# EAGLE board motor (EAGLE 5.07)
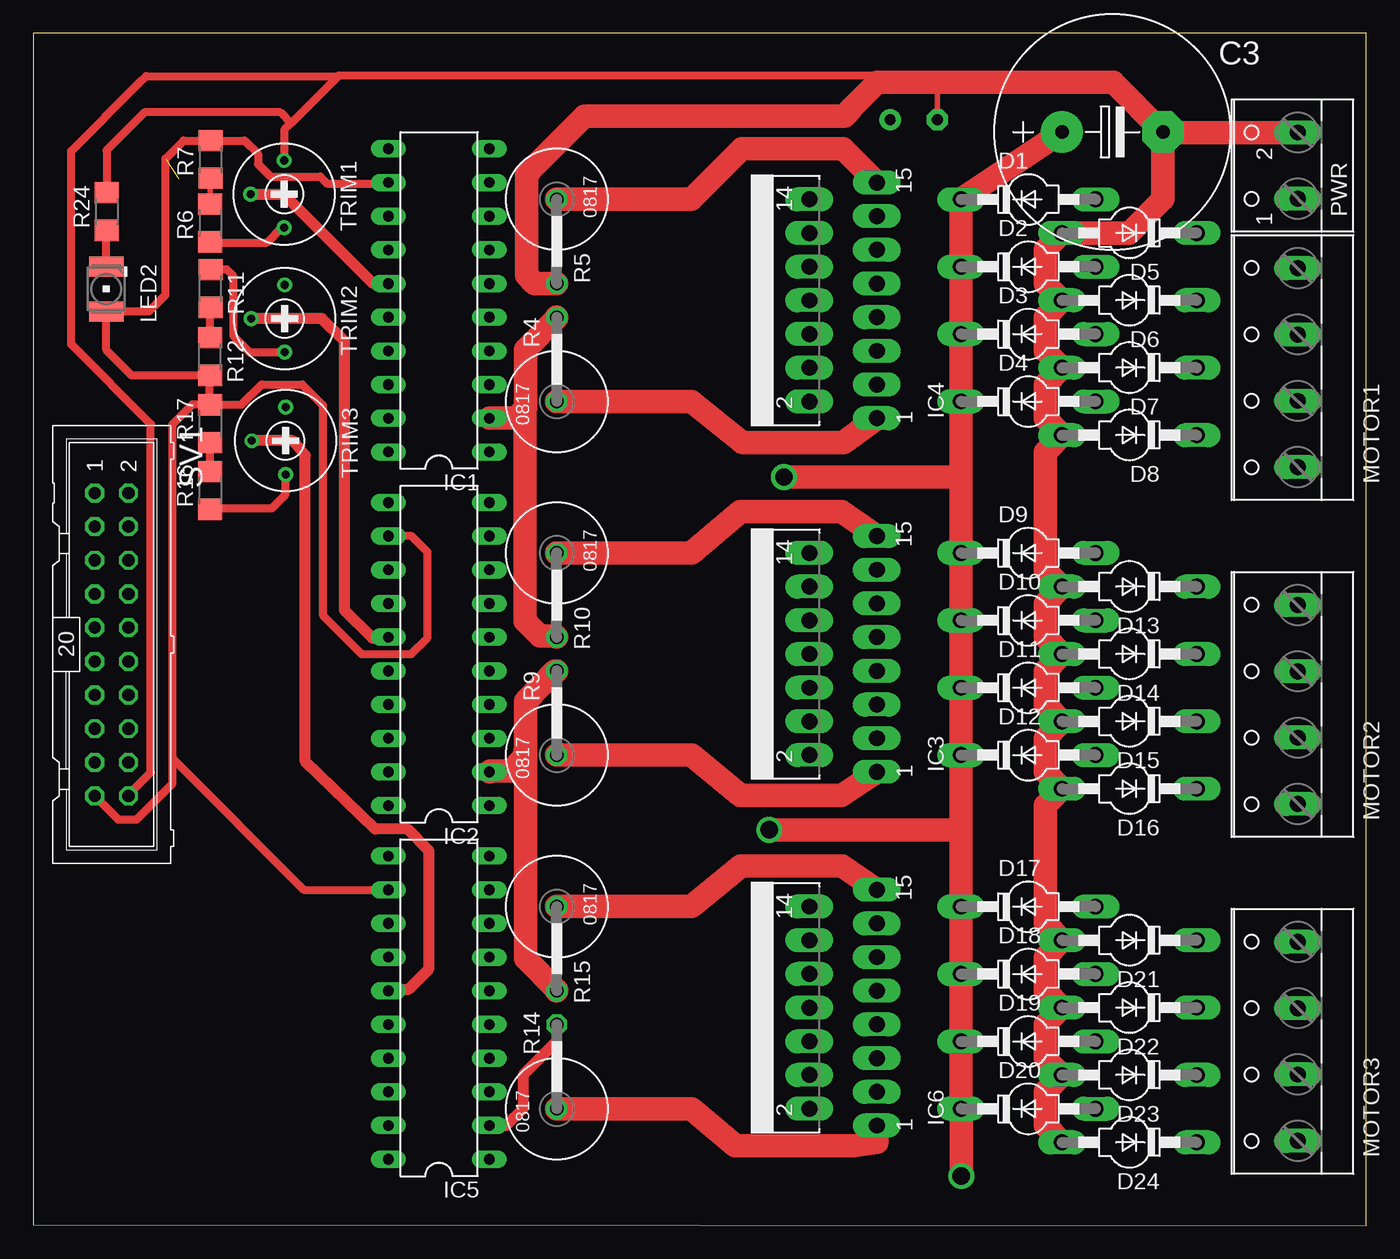
[diagram p0: board, top side]
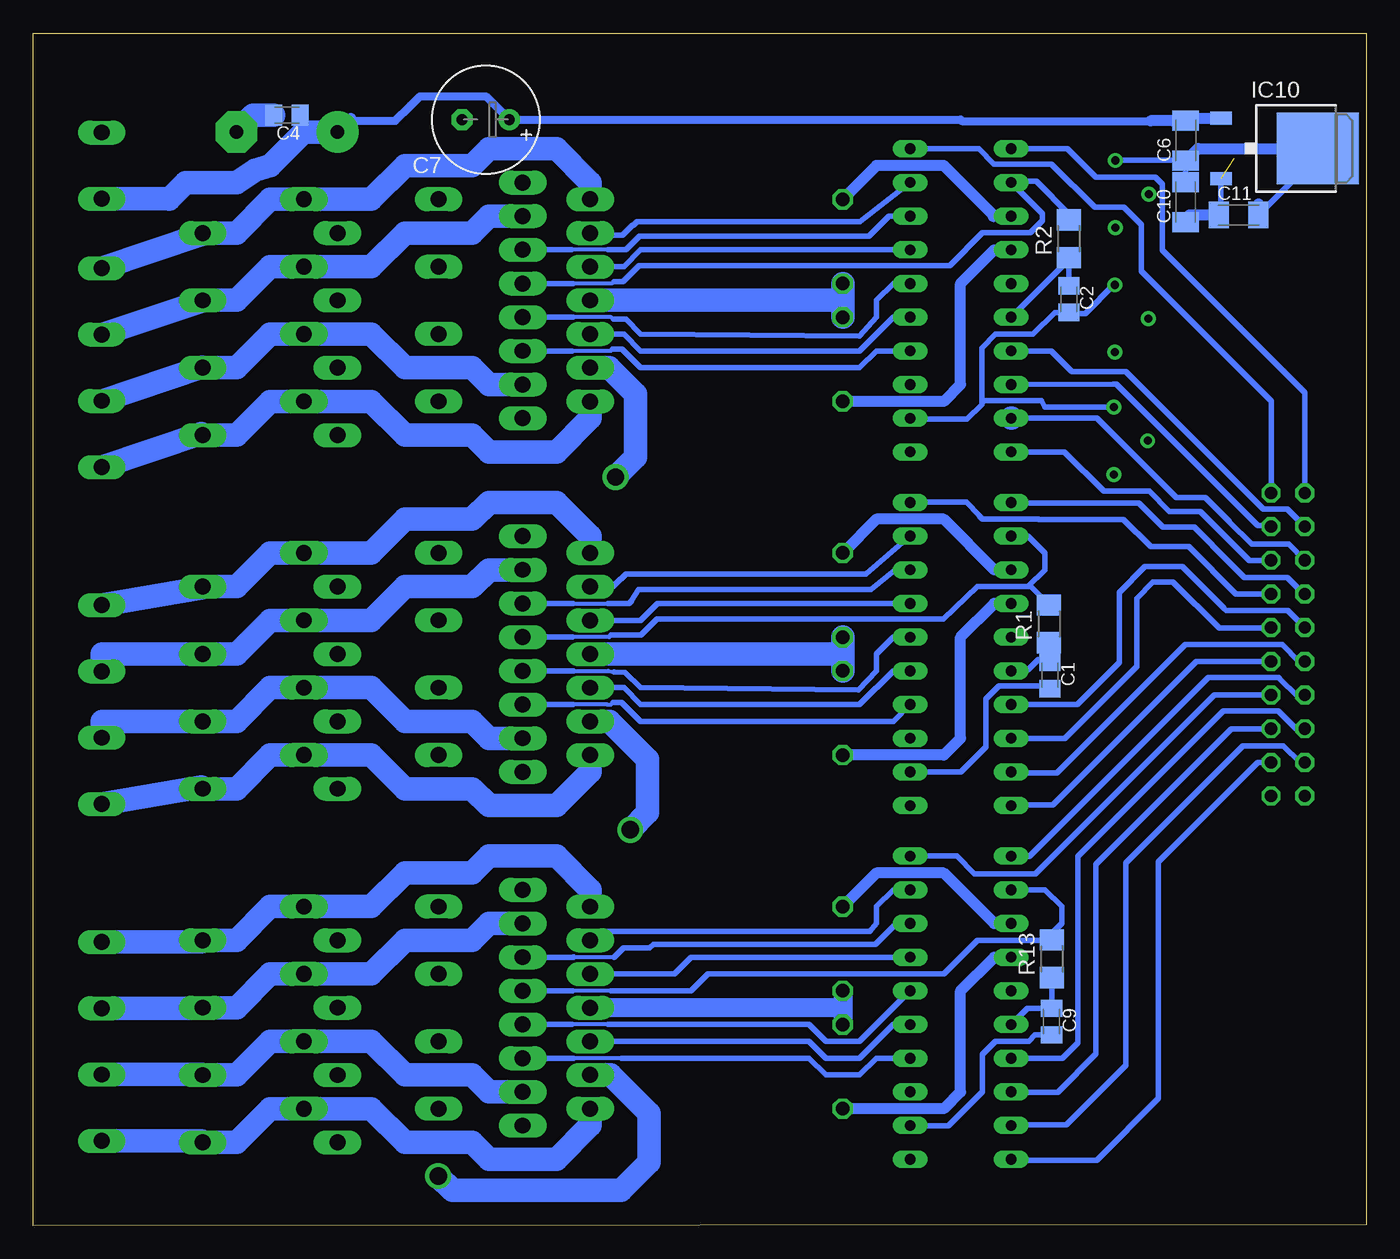
[diagram p1: board, bottom side, seen from below]

Size 100.54 x 89.94 mm. Coordinates in mm from the lower left corner, seen from the top.
Outline: 0.01,0.08 100.54,0 100.53,89.93 0,89.94 0.01,0.08
Copper layers (1*16): Top 0.035mm / dielectric 1.5mm / Bottom 0.035mm
Design rules "default": minimum track width 10mil, minimum drill 24mil, track to track 8mil, track to pad 8mil, pad to pad 8mil, via to via 8mil, smd to smd 8mil, copper to edge 40mil, drill to drill 8mil, minimum pad ring 10mil, minimum via ring 8mil, stop-mask expansion 4mil, vias tented up to drill 0mil, thermal gap 10mil

## Footprints (pad centres in the part's own frame; a part is rotated, then mirrored left to right if it is on the bottom)
C0805K = smd 1.3 x 1.6: 1 -1,0; 2 1,0
E7,5-18 = drill 1.016 pad 3.15 round: + -3.81,0 | drill 1.016 pad 3.15 octagon: - 3.81,0
C1206K = smd 1.5 x 2: 1 -1.5,0; 2 1.5,0
E3,5-8 = drill 0.813 pad 1.6 round: + -1.778,0 | drill 0.813 pad 1.6 octagon: - 1.778,0
SOD57-10 = drill 1.194 long: A 5.08,0; C -5.08,0
DIL20 = drill 0.813 long: 1 -11.43,-3.81; 2 -8.89,-3.81; 3 -6.35,-3.81; 4 -3.81,-3.81; 5 -1.27,-3.81; 6 1.27,-3.81; 7 3.81,-3.81; 8 6.35,-3.81; 9 8.89,-3.81; 10 11.43,-3.81; 11 11.43,3.81; 12 8.89,3.81; 13 6.35,3.81; 14 3.81,3.81; 15 1.27,3.81; 16 -1.27,3.81; 17 -3.81,3.81; 18 -6.35,3.81; 19 -8.89,3.81; 20 -11.43,3.81
MULTIWATT-15 = drill 1.2 long: 1 -8.89,-7.62; 2 -7.62,-2.54; 3 -6.35,-7.62; 4 -5.08,-2.54; 5 -3.81,-7.62; 6 -2.54,-2.54; 7 -1.27,-7.62; 8 0,-2.54; 9 1.27,-7.62; 10 2.54,-2.54; 11 3.81,-7.62; 12 5.08,-2.54; 13 6.35,-7.62; 14 7.62,-2.54; 15 8.89,-7.62
TO252 = smd 1 x 1.6: 1 -2.28,-4.8; 2 2.28,-4.8 | smd 5.4 x 6.2: 3 0,2.5
PLCC2 = smd 2.6 x 1.5: A 0,1.7; C 0,-1.7
W237-4 = drill 1.194 long: 1 -7.5,-1.27; 2 -2.5,-1.27; 3 2.5,-1.27; 4 7.5,-1.27
W237-102 = drill 1.194 long: 1 -2.5,-1.27; 2 2.5,-1.27
R1206 = smd 1.6 x 1.803: 1 -1.422,0; 2 1.422,0
P0817V = drill 1.016 octagon: 1 -5.08,0; 2 1.27,0
ML20 = drill 0.914 octagon: 1 -11.43,-1.27; 2 -11.43,1.27; 3 -8.89,-1.27; 4 -8.89,1.27; 5 -6.35,-1.27; 6 -6.35,1.27; 7 -3.81,-1.27; 8 -3.81,1.27; 9 -1.27,-1.27; 10 -1.27,1.27; 11 1.27,-1.27; 12 1.27,1.27; 13 3.81,-1.27; 14 3.81,1.27; 15 6.35,-1.27; 16 6.35,1.27; 17 8.89,-1.27; 18 8.89,1.27; 19 11.43,-1.27; 20 11.43,1.27
RTRIM3339P = drill 0.61 round: 1 -2.54,0; 2 0,-2.54; 3 2.54,0

## Placement (x,y rotation side)
C1  3,3n  [C0805K]  23.86,41.51 270 bottom
C2  3,3n  [C0805K]  22.44,69.88 270 bottom
C3  2,2m  [E7,5-18]  81.4,82.49 0 top
C4  100n  [C0805K]  81.4,83.76 180 bottom
C6  470u  [C1206K]  13.62,81.83 90 bottom
C7  100n  [E3,5-8]  66.4,83.42 180 bottom
C9  3,3n  [C0805K]  23.74,15.4 270 bottom
C10  10u  [C1206K]  13.64,77.2 90 bottom
C11  100n  [C1206K]  9.64,76.23 0 bottom
D1  BYV27  [SOD57-10]  75.05,77.41 0 top
D2  BYV27  [SOD57-10]  75.05,72.33 0 top
D3  BYV27  [SOD57-10]  75.05,67.25 0 top
D4  BYV27  [SOD57-10]  75.05,62.17 0 top
D5  BYV27  [SOD57-10]  82.67,74.87 180 top
D6  BYV27  [SOD57-10]  82.67,69.79 180 top
D7  BYV27  [SOD57-10]  82.67,64.71 180 top
D8  BYV27  [SOD57-10]  82.67,59.63 180 top
D9  BYV27  [SOD57-10]  75.05,50.74 0 top
D10  BYV27  [SOD57-10]  75.05,45.66 0 top
D11  BYV27  [SOD57-10]  75.05,40.58 0 top
D12  BYV27  [SOD57-10]  75.05,35.5 0 top
D13  BYV27  [SOD57-10]  82.67,48.2 180 top
D14  BYV27  [SOD57-10]  82.67,43.12 180 top
D15  BYV27  [SOD57-10]  82.67,38.04 180 top
D16  BYV27  [SOD57-10]  82.67,32.96 180 top
D17  BYV27  [SOD57-10]  75.05,24.07 0 top
D18  BYV27  [SOD57-10]  75.05,18.99 0 top
D19  BYV27  [SOD57-10]  75.05,13.91 0 top
D20  BYV27  [SOD57-10]  75.05,8.83 0 top
D21  BYV27  [SOD57-10]  82.67,21.53 180 top
D22  BYV27  [SOD57-10]  82.67,16.45 180 top
D23  BYV27  [SOD57-10]  82.67,11.37 180 top
D24  BYV27  [SOD57-10]  82.67,6.29 180 top
IC1  L297  [DIL20]  30.6,69.79 90 top
IC2  L297  [DIL20]  30.6,43.12 90 top
IC3  L298  [MULTIWATT-15]  56,43.12 90 top
IC4  L298  [MULTIWATT-15]  56,69.79 90 top
IC5  L297  [DIL20]  30.6,16.45 90 top
IC6  L298  [MULTIWATT-15]  56,16.45 90 top
IC10  7805DT  [TO252]  6.16,81.24 270 bottom
LED2  LG_T679-E1F1-1  [PLCC2]  5.51,70.64 180 top
MOTOR1  [W237-4]  94.1,64.71 90 top
MOTOR2  [W237-4]  94.1,39.31 90 top
MOTOR3  [W237-4]  94.1,13.91 90 top
PWR  [W237-102]  94.1,79.95 90 top
R1  22k  [R1206]  23.94,45.4 90 bottom
R2  22k  [R1206]  22.44,74.44 90 bottom
R4  0,5  [P0817V]  39.49,67.25 90 top
R5  0,5  [P0817V]  39.49,72.33 270 top
R6  5,6k  [R1206]  13.36,75.61 90 top
R7  560  [R1206]  13.38,80.42 90 top
R9  0,5  [P0817V]  39.49,40.58 90 top
R10  0,5  [P0817V]  39.49,45.66 270 top
R11  5,6k  [R1206]  13.38,70.69 270 top
R12  560  [R1206]  13.34,65.55 270 top
R13  22k  [R1206]  23.72,20.13 90 bottom
R14  0,5  [P0817V]  39.49,13.91 90 top
R15  0,5  [P0817V]  39.49,18.99 270 top
R16  5,6k  [R1206]  13.35,55.45 90 top
R17  560  [R1206]  13.35,60.49 90 top
R24  1k  [R1206]  5.54,76.49 90 top
SV1  [ML20]  5.91,43.83 270 top
TRIM1  10k  [RTRIM3339P]  18.94,77.8 270 top
TRIM2  10k  [RTRIM3339P]  18.97,68.42 270 top
TRIM3  10k  [RTRIM3339P]  19.03,59.2 270 top

## Library data of the parts
C1-C4 C6 C7 C9-C11 R1 R2 R4-R7 R9-R17 R24 TRIM1-TRIM3 = rcl
D1-D24 = diode
IC1-IC6 = st-microelectronics
IC10 = linear
LED2 = led; COLOR: green
MOTOR1-MOTOR3 PWR = con-wago-500
SV1 = con-ml

## Nets
+5V: C10.1 C11.1 IC1.12 IC2.12 IC3.9 IC4.9 IC5.12 IC6.9 IC10.2 LED2.A R1.2 R2.2 R7.2 R12.2 R13.2 R17.2 SV1.19
+24V: C3.+ C4.1 C6.2 C7.+ D1.C D2.C D3.C D4.C D9.C D10.C D11.C D12.C D17.C D18.C D19.C D20.C IC3.4 IC4.4 IC6.4 IC10.1 PWR.1
CLK1: IC1.18 SV1.4
CLK2: IC2.18 SV1.10
CLK3: IC5.18 SV1.16
CTL1: IC1.11 SV1.1
CTL2: IC2.11 SV1.7
CTL3: IC5.11 SV1.13
CW1: IC1.17 SV1.3
CW2: IC2.17 SV1.9
CW3: IC5.17 SV1.15
EN1: IC1.10 SV1.2
EN2: IC2.10 SV1.8
EN3: IC5.10 SV1.14
GND: C1.2 C2.2 C3.- C4.2 C6.1 C7.- C9.2 C10.2 C11.2 D5.A D6.A D7.A D8.A D13.A D14.A D15.A D16.A D21.A D22.A D23.A D24.A IC1.2 IC2.2 IC3.8 IC4.8 IC5.2 IC6.8 IC10.3 PWR.2 R4.2 R5.2 R9.2 R10.2 R14.2 R15.2 R24.2 SV1.20 TRIM1.1 TRIM2.1 TRIM3.1
HF1: IC1.19 SV1.5
HF2: IC2.19 SV1.11
HF3: IC5.19 SV1.17
N$1: IC1.9 IC4.12
N$2: IC1.7 IC4.10
N$3: IC1.6 IC4.7
N$4: IC1.4 IC4.5
N$6: C2.1 IC1.16 R2.1
N$7: IC1.5 IC4.6
N$8: IC1.8 IC4.11
N$9: IC2.9 IC3.12
N$10: IC2.7 IC3.10
N$11: IC2.6 IC3.7
N$12: IC1.14 IC4.1 R4.1
N$13: IC1.15 TRIM1.2
N$14: D4.A D8.C IC4.2 MOTOR1.1
N$15: D1.A D5.C IC4.14 MOTOR1.4
N$16: D2.A D6.C IC4.13 MOTOR1.3
N$17: D3.A D7.C IC4.3 MOTOR1.2
N$19: IC1.13 IC4.15 R5.1
N$20: IC2.4 IC3.5
N$21: C1.1 IC2.16 R1.1
N$22: IC2.5 IC3.6
N$23: R6.1 TRIM1.3
N$24: R6.2 R7.1
N$26: IC2.8 IC3.11
N$30: IC2.14 IC3.1 R9.1
N$31: D12.A D16.C IC3.2 MOTOR2.1
N$32: D9.A D13.C IC3.14 MOTOR2.4
N$33: D10.A D14.C IC3.13 MOTOR2.3
N$34: D11.A D15.C IC3.3 MOTOR2.2
N$35: IC2.13 IC3.15 R10.1
N$36: IC2.15 TRIM2.2
N$37: R11.1 TRIM2.3
N$38: R11.2 R12.1
N$39: IC5.9 IC6.12
N$40: IC5.7 IC6.10
N$41: IC5.6 IC6.7
N$42: IC5.4 IC6.5
N$43: C9.1 IC5.16 R13.1
N$44: IC5.5 IC6.6
N$45: IC5.8 IC6.11
N$46: IC5.14 IC6.1 R14.1
N$47: D20.A D24.C IC6.2 MOTOR3.1
N$48: D17.A D21.C IC6.14 MOTOR3.4
N$49: D18.A D22.C IC6.13 MOTOR3.3
N$50: D19.A D23.C IC6.3 MOTOR3.2
N$51: IC5.13 IC6.15 R15.1
N$52: IC5.15 TRIM3.2
N$53: R16.1 TRIM3.3
N$54: R16.2 R17.1
N$64: LED2.C R24.1
RS1: IC1.20 SV1.6
RS2: IC2.20 SV1.12
RS3: IC5.20 SV1.18

## Tracks (layer width: path | path; a pad name or v marks a point on that pad's centre or on a via)
+5V  (1 unrouted)
  Top 0.61: IC5.12 20.4,25.34 10.51,35.23 | 10.51,35.23 10.51,60.44 12.02,61.96 13.3,61.96 | 13.3,61.96 R17.2 15.7,61.91 17.23,63.44 20.3,63.44 21.84,61.9 21.84,46.07 24.79,43.12 28.51,43.12 29.74,44.34 29.74,50.82 28.55,52 IC2.12 | 10.51,35.23 10.51,33.34 7.8,30.64 6.41,30.64 SV1.19 | IC1.12 26.7,78.6 22.16,78.6 21.64,79.12 17.9,79.12 16.95,80.07 16.95,80.83 15.94,81.84 R7.2 11.35,81.84 9.98,80.48 9.98,70.21 8.75,68.97 5.54,68.97 LED2.A 5.51,66.04 7.42,64.13 R12.2 13.3,64.09 13.3,61.96
  Bottom 0.305: 59.83,71.06 56.89,71.06 56.73,71.21 | 59.85,17.72 57.36,17.72 56.97,17.72 | 59.86,44.39 57.1,44.39 56.95,44.54
  Bottom 0.406: 23.91,21.87 22.98,22.8 22.98,24.07 24.25,25.34 IC5.12 | 23.91,21.87 24.25,21.53 29.33,21.53 31.87,18.99 49.65,18.99 50.92,17.72 56.97,17.72 | 25.52,48.2 29.33,48.2 31.88,45.77 53.47,45.77 54.7,44.54 56.95,44.54 | 25.52,48.2 24.25,49.47 24.25,50.74 25.52,52.01 IC2.12 | 25.52,48.2 25.31,48.2 R1.2 | R13.2 23.72,21.68 23.91,21.87 | R2.2 22.44,76.31 24.9,78.76 26.7,78.76 IC1.12 24.42,76.32 24.42,75.8 25.35,74.88 28.95,74.88 31.42,72.41 54.85,72.41 56.05,71.21 56.73,71.21 | 59.83,71.06 IC4.9 | 59.83,71.06 | IC6.9 59.86,17.72 59.85,17.72 | IC3.9 59.86,44.39 | 10.96,76.41 IC10.2
  Bottom 0.813: 10.96,76.41 C11.1 13.34,76.23 C10.1
+24V  (via drill 1.3 pad 1.78)
  Top 1.778: C3.+ D1.C D2.C D3.C D4.C 69.97,56.63 | 69.97,29.36 69.97,24.7 69.9,24.64 69.9,24.13 D17.C D18.C D19.C D20.C 69.99,8.81 v69.99,3.75 | 69.97,29.36 D12.C D11.C D10.C D9.C 69.97,56.63 | v56.62,56.46 69.79,56.46 69.97,56.63 | v55.51,29.87 69.46,29.87 69.97,29.36
  Bottom 0.61: 76.75,83.33 73.22,83.33 72.08,84.47 | 72.08,84.47 | 72.08,84.47 71.37,85.18 66.39,85.18 C7.+ 30.6,83.42 30.5,83.32 14.63,83.32 14.61,83.33
  Bottom 0.813: C4.1 80.4,82.76 80.13,82.49 | IC10.1 13.43,83.52 C6.2 14.61,83.33 16.29,83.33 | C3.+ 76.75,83.33 76.58,83.5
  Bottom 1.778: PWR.1 90.33,77.45 90.29,77.41 89.02,78.68 85.21,78.68 83.79,79.62 82.67,79.95 80.13,82.49 C3.+ | IC4.4 57.09,64.71 55.11,62.73 55.11,57.96 v56.62,56.46 | IC3.4 57.08,38.04 54.2,35.16 54.2,31.17 v55.51,29.87 | IC6.4 57.01,11.37 54.11,8.47 54.11,4.79 56.21,2.69 68.92,2.69 v69.99,3.75
CLK1
  Bottom 0.406: IC1.18 26.77,63.43 19.07,63.49 18.87,63.49 8.18,52.8 7.26,52.8 SV1.4
CLK2
  Bottom 0.406: IC2.18 22.73,36.77 17.32,42.17 17.32,47.31 16.08,48.55 14.58,48.55 11.1,45.07 7.22,45.07 SV1.10
CLK3
  Bottom 0.406: SV1.16 10.17,37.49 20.39,27.26 20.39,12.95 23.26,10.08 26.77,10.08 IC5.18
CTL1
  Bottom 0.406: IC1.11 22.55,81.22 20.4,79.07 15.9,79.07 15.38,78.55 15.38,73.59 4.63,62.84 4.63,55.28 SV1.1
CTL2
  Bottom 0.406: 23.24,54.52 22.14,54.52 | 23.24,54.52 26.76,54.52 IC2.11 | SV1.7 4.72,47.65 5.77,48.7 | 5.77,48.7 | 5.77,48.7 5.96,48.88 9.19,48.88 11.61,51.31 11.61,51.33 12.96,52.68 15.33,52.68 17.16,54.5 23.22,54.5 23.24,54.52
CTL3
  Bottom 0.406: SV1.13 5.29,40.03 6.44,41.17 | 6.44,41.17 | 6.44,41.17 6.62,41.35 11.92,41.35 25.41,27.85 26.75,27.85 IC5.11
CW1
  Bottom 0.406: IC1.17 23.75,65.98 22.2,64.43 18.14,64.43 7.75,54.04 5.96,54.04 SV1.3
CW2
  Bottom 0.406: IC2.17 21.79,39.31 18.64,42.46 18.64,47.76 16.69,49.71 13.87,49.71 12.16,48 12.15,48 10.74,46.58 10.74,46.57 10.57,46.4 5.94,46.4 SV1.9
CW3
  Bottom 0.406: SV1.15 5.28,37.49 6.48,38.69 6.51,38.69 6.64,38.82 10.79,38.82 21.75,27.86 21.75,13.81 22.93,12.63 IC5.17
EN1
  Bottom 0.406: IC1.10 29.22,81.22 28.07,80.07 23.75,80.07 20.49,76.81 18.27,76.81 16.96,75.51 16.96,71.98 7.16,62.18 7.16,55.29 SV1.2
EN2
  Bottom 0.406: IC2.10 34.39,54.56 30.17,54.56 29.19,53.57 29.19,53.53 28.95,53.3 24.72,53.3 24.69,53.27 18.32,53.27 16.27,51.21 13.4,51.21 9.83,47.65 SV1.8
EN3
  Bottom 0.406: SV1.14 11.47,40.03 24.94,26.55 29.56,26.55 30.89,27.88 IC5.10
GND
  Top 0.406: C7.- 68.18,85.96 67.91,86.23
  Top 0.61: TRIM1.1 18.94,82.65 19.45,83.16 | 22.99,86.7 19.45,83.16 | 65.07,86.23 64.55,86.75 23.04,86.75 22.99,86.7 | R24.2 5.55,81.11 8.4,83.97 18.65,83.97 19.45,83.16 | SV1.20 7.18,32.48 8.88,34.18 8.88,60.46 2.86,66.49 2.86,81.04 7.94,86.12 7.94,86.13 8.24,86.42 8.52,86.7 22.99,86.7
  Top 0.813: IC5.2 35.68,7.56 36.95,8.83 36.95,11.37 39.49,13.91 R14.2
  Top 1.778: D24.A 76.32,7.56 76.32,10.1 D23.A 76.32,12.64 76.32,15.18 D22.A 76.32,17.72 76.32,20.26 D21.A 76.32,22.8 76.32,31.69 D16.A 76.32,34.23 76.32,36.77 D15.A 76.32,39.31 76.32,41.85 D14.A 76.32,44.39 76.32,46.93 D13.A 76.32,49.47 76.32,58.36 D8.A 76.32,60.9 76.32,63.44 D7.A 76.32,65.98 76.32,68.52 D6.A 76.32,71.06 76.32,73.6 D5.A 82.67,74.87 85.21,77.41 C3.- | PWR.2 85.25,82.45 C3.- | C3.- 81.46,86.23 67.91,86.23 65.07,86.23 63.68,86.23 61.72,84.27 61.72,84.24 61.18,83.69 41.58,83.69 37.34,79.45 37.34,79.39 37.19,79.24 37.19,71.69 37.83,71.06 R5.2 | R4.2 39.49,68.44 37.13,66.08 37.13,61.67 37.01,61.55 | IC1.2 34.44,60.93 36.39,60.93 37.01,61.55 | R9.2 39.35,41.85 37.15,39.53 37.15,35.98 | 37.15,35.98 37.04,35.31 36.03,34.3 34.48,34.3 IC2.2 | R15.2 39.49,17.81 37.12,20.18 37.12,35.89 37.15,35.98 | 37.01,61.55 37.08,61.55 37.08,45.61 38.22,44.47 39.41,44.47 R10.2
  Bottom 0.406: TRIM2.1 19.02,70.96 21.18,68.8 22.37,68.8 C2.2 23.49,68.88 25.14,67.23 27.99,67.23 29.01,66.2 29.01,61.95 | C1.2 23.92,40.69 27.73,40.69 28.68,39.74 28.68,36.12 30.58,34.23 IC2.2 | C10.2 13.6,80.31 C6.1 13.63,80.34 TRIM1.1 | TRIM3.1 24.23,61.74 24.52,62.21 28.9,62.21 29.01,61.95 | IC1.2 34.32,60.82 30.14,60.82 29.01,61.95 | C9.2 24.99,14.4 25.47,13.92 27.97,13.92 28.94,12.95 28.94,10.12 31.52,7.54 34.39,7.54 IC5.2 | IC4.8 39.5,69.79 39.5,71.08 | IC3.8 39.61,43.12 39.55,43.18 39.55,44.36 39.49,44.41 | 4.91,80.28 4.91,79.46 C11.2
  Bottom 0.813: C6.1 12.71,81.24 IC10.3 4.2,80.71 4.33,80.71 4.75,80.28 4.91,80.28 | C11.2 8.14,77.05
  Bottom 1.422: 39.49,16.45 IC6.8 | R15.2 39.49,16.45 | 39.49,16.45 R14.2
  Bottom 1.778: 39.49,43.12 IC3.8 | 39.49,43.12 R9.2 | R10.2 39.49,43.12 | IC4.8 39.49,69.79 R5.2 R4.2 | C4.2 83.94,83.76 C3.-
HF1
  Bottom 0.406: IC1.19 20.34,60.89 14.35,54.9 12.13,54.9 10.34,53.11 10.34,53.08 8.65,51.4 5.86,51.4 SV1.5
  Bottom 1.778: IC1.19
HF2
  Bottom 0.406: IC2.19 26.7,34.14 23.33,34.14 13.64,43.84 6.35,43.84 5.08,42.57 SV1.11
HF3
  Bottom 0.406: SV1.17 5,34.95 6.25,36.19 9.32,36.19 18.15,27.36 18.15,12.09 22.62,7.62 26.72,7.62 IC5.19
N$1
  Bottom 0.406: IC1.9 38.18,75.71 54.99,75.71 55.25,75.46 55.32,75.46 56.09,74.69 58.36,74.69 IC4.12
N$2
  Bottom 0.406: IC4.10 56,72.33 54.73,73.6 IC1.7
N$3
  Bottom 0.305: 59.8,68.52 56.95,68.52 56.79,68.36
  Bottom 0.406: IC1.6 35.68,71.06 36.95,69.79 36.95,68.52 38.23,67.09 54.73,67.25 55.83,68.36 56.79,68.36 | 59.8,68.52 IC4.7 | 59.8,68.52
N$4
  Bottom 0.305: 59.88,65.98 56.99,65.98 56.85,66.11
  Bottom 0.406: IC1.4 36.95,65.98 38.22,64.71 54.73,64.71 56.13,66.11 56.85,66.11 | IC4.5 59.89,65.98 59.88,65.98
N$6
  Bottom 0.406: C2.1 R2.1 22.44,72.86 IC1.16
N$7
  Bottom 0.406: IC4.6 56,67.25 54.73,65.98 38.22,65.98 35.68,68.52 IC1.5
N$8
  Bottom 0.305: 59.95,73.6 57.2,73.6
  Bottom 0.406: 37.1,75.04 37.52,74.62 54.82,74.62 55.84,73.6 55.85,73.6 57.2,73.6 | 37.1,75.04 | 37.1,75.04 35.99,76.15 IC1.8 | IC4.11 59.96,73.6 59.95,73.6
N$9
  Bottom 0.406: IC2.9 37.75,49.14 55.84,49.14 56.21,48.77 56.25,48.77 56.84,48.18 58.51,48.18 IC3.12
N$10
  Bottom 0.406: IC3.10 54.73,45.66 53.46,46.93 IC2.7
N$11
  Bottom 0.305: 59.78,41.85 57.17,41.85 56.75,41.75
  Bottom 0.406: IC2.6 35.68,44.39 36.95,43.12 36.95,41.85 38.29,40.42 54.73,40.58 55.89,41.74 56.75,41.75 | IC3.7 59.78,41.85
N$12
  Top 1.778: IC4.1 61.11,59.06 53.49,59.06 49.65,62.17 R4.1
  Bottom 0.813: R4.1 31.87,62.17 30.6,63.44 30.6,71.06 28.06,73.6 IC1.14
N$13
  Top 0.813: TRIM1.2 18.9,77.8 25.64,71.06 IC1.15
N$14
  Bottom 1.778: MOTOR1.1 87.87,59.75 D8.C 85.21,59.63 82.67,62.17 D4.A 75.05,62.17 72.51,59.63 67.43,59.63 66.16,58.36 61.08,58.36 58.54,60.9 IC4.2
N$15
  Bottom 1.778: MOTOR1.4 87.87,74.75 D5.C 85.21,74.87 82.67,77.41 D1.A 75.05,77.41 72.51,79.95 67.43,79.95 66.16,81.22 61.08,81.22 58.54,78.68 IC4.14
N$16
  Bottom 1.778: MOTOR1.3 87.79,69.75 D6.C 85.21,69.79 82.67,72.33 D2.A 75.05,72.33 72.51,74.87 67.43,74.87 66.16,76.14 IC4.13
N$17
  Bottom 1.778: MOTOR1.2 87.79,64.75 D7.C 85.21,64.71 82.67,67.25 D3.A 75.05,67.25 72.51,64.71 67.43,64.71 66.16,63.44 IC4.3
N$19
  Top 1.778: IC4.15 61.08,81.22 53.46,81.22 49.65,77.41 R5.1
  Bottom 0.813: R5.1 36.95,79.95 31.87,79.95 28.06,76.14 28.09,76.1 28.12,76.1 28.09,76.14 IC1.13
N$20
  Bottom 0.305: 59.81,39.31 57.23,39.31 56.97,39.31 56.81,39.47
  Bottom 0.406: IC2.4 35.68,38.04 54.73,38.04 56.15,39.47 56.81,39.47 | IC3.5 59.81,39.31
N$21
  Bottom 0.406: R1.1 23.94,42.75 C1.1 24.74,42.72 25.49,41.96 26.67,41.96 IC2.16
N$22
  Bottom 0.406: IC3.6 56,40.58 54.73,39.31 38.22,39.31 35.68,41.85 IC2.5
N$23
  Top 0.61: TRIM1.3 18.76,75.26 17.64,74.15 13.4,74.15 R6.1
N$24
  Top 0.406: R6.2 13.36,78.98 R7.1
N$26
  Bottom 0.305: 59.82,46.93 57.2,46.93 57.19,46.94
  Bottom 0.406: IC2.8 35.56,49.47 37.35,48 54.88,48 55.4,47.15 55.4,47.13 55.59,46.94 57.19,46.94 | 63.6,46.94 IC3.11 59.82,46.93
N$30
  Top 1.778: IC3.1 60.96,32.45 53.34,32.45 49.65,35.5 R9.1
  Bottom 0.813: R9.1 31.87,35.5 30.6,36.77 30.6,44.39 28.06,46.93 IC2.14
N$31
  Bottom 1.778: MOTOR2.1 87.87,33.08 D16.C 85.21,32.96 82.67,35.5 D12.A 75.05,35.5 72.51,32.96 67.43,32.96 66.16,31.69 61.08,31.69 58.54,34.23 IC3.2
N$32
  Bottom 1.778: MOTOR2.4 87.87,48.08 D13.C 85.21,48.2 82.67,50.74 D9.A 75.05,50.74 72.51,53.28 67.43,53.28 66.16,54.55 61.08,54.55 58.54,52.01 IC3.14
N$33
  Bottom 1.778: MOTOR2.3 95.33,43.12 D14.C 85.21,43.12 82.67,45.66 D10.A 75.05,45.66 72.51,48.2 67.43,48.2 66.16,49.47 IC3.13
N$34
  Bottom 1.778: MOTOR2.2 95.33,38.04 D15.C 85.21,38.04 82.67,40.58 D11.A 75.05,40.58 72.51,38.04 67.43,38.04 66.16,36.77 IC3.3
N$35
  Top 1.778: IC3.15 60.95,53.85 53.33,53.85 49.65,50.74 R10.1
  Bottom 0.813: R10.1 36.95,53.28 31.87,53.28 28.06,49.47 IC2.13
N$36
  Top 0.813: TRIM2.2 21.77,68.42 23.49,66.7 23.49,46.42 25.59,44.32 26.71,44.32 IC2.15
N$37
  Top 0.61: TRIM2.3 16.33,65.88 15.11,67.1 15.11,71.6 14.6,72.11 R11.1
N$38
  Top 0.61: R12.1 13.34,69.23 R11.2
N$39
  Bottom 0.406: IC5.9 35.68,25.34 36.95,24.07 36.95,22.8 37.42,22.2 55.06,22.2 55.07,22.19 57.87,22.19 IC6.12
N$40
  Bottom 0.406: IC6.10 52.19,18.99 50.92,20.26 IC5.7
N$41
  Bottom 0.305: 57.18,15.18 59.89,15.18 | 57.18,15.18
  Bottom 0.406: 42.02,15.18 42.03,15.18 | IC5.6 38.22,13.91 40.76,13.91 41.87,15.02 42.02,15.18 | IC6.7 59.89,15.18 | 42.02,15.18 57.18,15.18
N$42
  Bottom 0.305: 59.79,12.64 56.17,12.64
  Bottom 0.406: IC5.4 36.95,12.64 38.22,11.37 40.76,11.37 42.03,12.64 56.17,12.64 | IC6.5 59.79,12.64
N$43
  Bottom 0.406: R13.1 23.72,16.42 C9.1 25.56,16.4 IC5.16
N$44
  Bottom 0.406: IC6.6 42.03,13.91 40.76,12.64 38.22,12.64 35.68,15.18 IC5.5
N$45
  Bottom 0.305: 59.78,20.27 56.75,20.27 56.73,20.25
  Bottom 0.406: IC5.8 35.45,22.8 37.02,21.23 53.76,21.23 54.05,20.95 56.02,20.95 56.73,20.25 | IC6.11 59.79,20.26 59.78,20.27
N$46
  Top 1.778: IC6.1 63.62,6.29 61.85,6.04 52.96,6.04 49.65,8.83 R14.1
  Bottom 0.813: R14.1 31.87,8.83 30.6,10.1 30.6,17.72 28.06,20.26 IC5.14
N$47
  Bottom 1.778: MOTOR3.1 87.87,6.41 D24.C 85.21,6.29 82.67,8.83 D20.A 75.05,8.83 72.51,6.29 67.43,6.29 66.16,5.02 61.08,5.02 58.54,7.56 IC6.2
N$48
  Bottom 1.778: MOTOR3.4 87.87,21.41 D21.C 85.21,21.53 82.67,24.07 D17.A 75.05,24.07 72.51,26.61 67.43,26.61 66.16,27.88 61.08,27.88 58.54,25.34 IC6.14
N$49
  Bottom 1.778: MOTOR3.3 87.79,16.41 D22.C 85.21,16.45 82.67,18.99 D18.A 75.05,18.99 72.51,21.53 67.43,21.53 66.16,22.8 IC6.13
N$50
  Bottom 1.778: MOTOR3.2 87.79,11.41 D23.C 85.21,11.37 82.67,13.91 D19.A 75.05,13.91 72.51,11.37 67.43,11.37 66.16,10.1 IC6.3
N$51
  Top 1.778: IC6.15 61,27.16 53.38,27.16 49.65,24.07 R15.1
  Bottom 0.813: R15.1 36.95,26.61 31.87,26.61 28.06,22.8 IC5.13
N$52
  Top 0.813: TRIM3.2 19.59,59.2 20.51,58.09 20.51,35.01 25.79,29.92 28.23,29.92 29.86,28.29 29.86,19.38 28.32,17.84 26.9,17.84 IC5.15
N$53
  Top 0.61: TRIM3.3 19.03,55.15 18.01,54.13 13.4,54.13 13.07,54.46 13.07,54.31 R16.1
N$54
  Top 0.61: R16.2 R17.1
N$64
  Top 0.61: LED2.C 5.51,75.03 R24.1
RS1
  Bottom 0.406: IC1.20 22.75,58.36 19.79,55.4 16.37,55.4 14.85,53.87 12.53,53.87 8.84,50.18 SV1.6
RS2
  Bottom 0.406: IC2.20 26.75,31.73 23.65,31.73 12.81,42.57 SV1.12
RS3
  Bottom 0.406: SV1.18 8.19,34.95 15.69,27.44 15.69,9.6 20.34,4.95 26.72,4.95 IC5.20